# EAGLE board DISEÑO ELECTRONICO TITI (EAGLE 9.7.0)

Size 618.95 x 337.62 mm. Coordinates in mm from the lower left corner, seen from the top.
Outline: 0,0 618.95,0 618.95,337.62 0,337.62 0,0
Copper layers (1*16): Top 0.035mm / dielectric 1.5mm / Bottom 0.035mm
Design rules "default": minimum track width 6mil, minimum drill 0.35mm, track to track 6mil, track to pad 6mil, pad to pad 6mil, via to via 6mil, smd to smd 6mil, copper to edge 40mil, drill to drill 6mil, minimum pad ring 10mil, minimum via ring 8mil, stop-mask expansion 4mil, vias tented up to drill 0mil, thermal gap 10mil

## Footprints (pad centres in the part's own frame; a part is rotated, then mirrored left to right if it is on the bottom)
MOTOR = drill 1.118 pad 3.15 octagon: + 2.54,0; - -2.54,0
GL5528 = drill 0.8 pad 1.4: 1 -1.702,0; 2 1.702,0
SWITCH-SPDT-PTH-8.5X3.7MM = drill 1.016 pad 1.88: 1 -2.54,0; 2 0,0; 3 2.54,0
SEN-13322 = drill 1.016 long: 1 -2.54,0; 2 0,0; 3 2.54,0
TO92 = drill 0.813 octagon: 1 -1.27,0; 2 0,1.905; 3 1.27,0
ARDUINO-UNO-R3-SHIELD = drill 1.016 pad 1.88: 3.3V 24.13,-2.54; 5V 24.13,0; A0 24.13,12.7; A1 24.13,15.24; A2 24.13,17.78; A3 24.13,20.32; A4 24.13,22.86; A5 24.13,25.4; AREF -24.13,-13.97; D2 -24.13,20.32; D3 -24.13,17.78; D4 -24.13,15.24; D5 -24.13,12.7; D6 -24.13,10.16; D7 -24.13,7.62; D8 -24.13,3.81; D9 -24.13,1.27; D10 -24.13,-1.27; D11 -24.13,-3.81; D12 -24.13,-6.35; D13 -24.13,-8.89; GND@0 24.13,2.54; GND@1 24.13,5.08; GND@2 -24.13,-11.43; IOREF 24.13,-7.62; NC 24.13,-10.16; RES 24.13,-5.08; RX -24.13,25.4; SCL -24.13,-19.05; SDA -24.13,-16.51; TX -24.13,22.86; VIN 24.13,7.62
1X08 = drill 1.016 long: 1 -8.89,0; 2 -6.35,0; 3 -3.81,0; 4 -1.27,0; 5 1.27,0; 6 3.81,0; 7 6.35,0; 8 8.89,0
LCD-I2C = drill 1.016 long: 1 -19.05,-5.08; 2 -19.05,-7.62; 3 -19.05,-10.16; 4 -19.05,-12.7
TSOP48 = drill 0.8: 1 -2.54,0; 2 0,0; 3 2.54,0
DIP762W53P254L1969H508Q16B = drill 0.743 pad 1.343: 1 -3.81,8.89; 2 -3.81,6.35; 3 -3.81,3.81; 4 -3.81,1.27; 5 -3.81,-1.27; 6 -3.81,-3.81; 7 -3.81,-6.35; 8 -3.81,-8.89; 9 3.81,-8.89; 10 3.81,-6.35; 11 3.81,-3.81; 12 3.81,-1.27; 13 3.81,1.27; 14 3.81,3.81; 15 3.81,6.35; 16 3.81,8.89

## Placement (x,y rotation side)
M1  MOTOR_HDR  [MOTOR]  262.34,195.53 270 top
R1  PHOTOCELL_GL5528  [GL5528]  6.99,206.48 90 top
S1  TOGGLE  [SWITCH-SPDT-PTH-8.5X3.7MM]  234.29,197.72 90 top
SEN1  SEN-13322  [SEN-13322]  38.93,185.42 0 top
T1  NPN  [TO92]  612.86,4.83 0 top
U1  ARDUINO-UNO-R3-SHIELD  [ARDUINO-UNO-R3-SHIELD]  47.92,253.11 180 top
U2  TMP36GT9Z_TO92  [TO92]  66.71,165.79 180 top
U3  PINHD-1X08_1X08M  [1X08]  97.22,280.86 90 top
U4  TMP36GT9Z_TO92  [TO92]  99.7,163.81 180 top
U5  LCD-16X2-I2CSUNFOUNDER-IIC  [LCD-I2C]  155.69,330.08 0 top
U6  IR-RECEIVERTSOP48  [TSOP48]  223.03,198.01 270 top
U7  L293E  [DIP762W53P254L1969H508Q16B]  165.63,267.12 90 top

## Library data of the parts
M1 R1 S1 SEN1 U1-U7 = Tinkercad
T1 = Tinkercad; CATEGORY: Transistor; SUB-CATEGORY: BJT; TYPE: NPN

## Nets
M1_-: M1.- S1.2
U1_5V: S1.3 U1.5V U2.2 U3.5 U4.2 U5.2 U6.2 U7.1
U1_A0: SEN1.3 U1.A0
U1_A1: R1.1 U1.A1
U1_D4: U1.D4 U7.3
U1_D5: U1.D5 U7.2
U1_D7: U1.D7 U6.1
U1_D8: U1.D8 U2.1
U1_D9: U1.D9 U4.1
U1_GND: R1.2 SEN1.2 U1.GND@0 U1.GND@1 U1.GND@2 U2.3 U3.4 U4.3 U5.1 U6.3 U7.7
U1_SCL: U1.SCL U5.4
U1_SDA: U1.SDA U5.3
U3_1: U1.TX U3.1
U3_3: U1.RX U3.3

## Tracks (layer width: path | path; a pad name or v marks a point on that pad's centre or on a via)
M1_-  (1 unrouted)
U1_5V  (7 unrouted)
U1_A0  (1 unrouted)
U1_A1  (1 unrouted)
U1_D4  (1 unrouted)
U1_D5  (1 unrouted)
U1_D7  (1 unrouted)
U1_D8  (1 unrouted)
U1_D9  (1 unrouted)
U1_GND  (10 unrouted)
U1_SCL  (1 unrouted)
U1_SDA  (1 unrouted)
U3_1  (1 unrouted)
U3_3  (1 unrouted)